# EAGLE board xv11_lidar_controller (EAGLE 6.5.0)
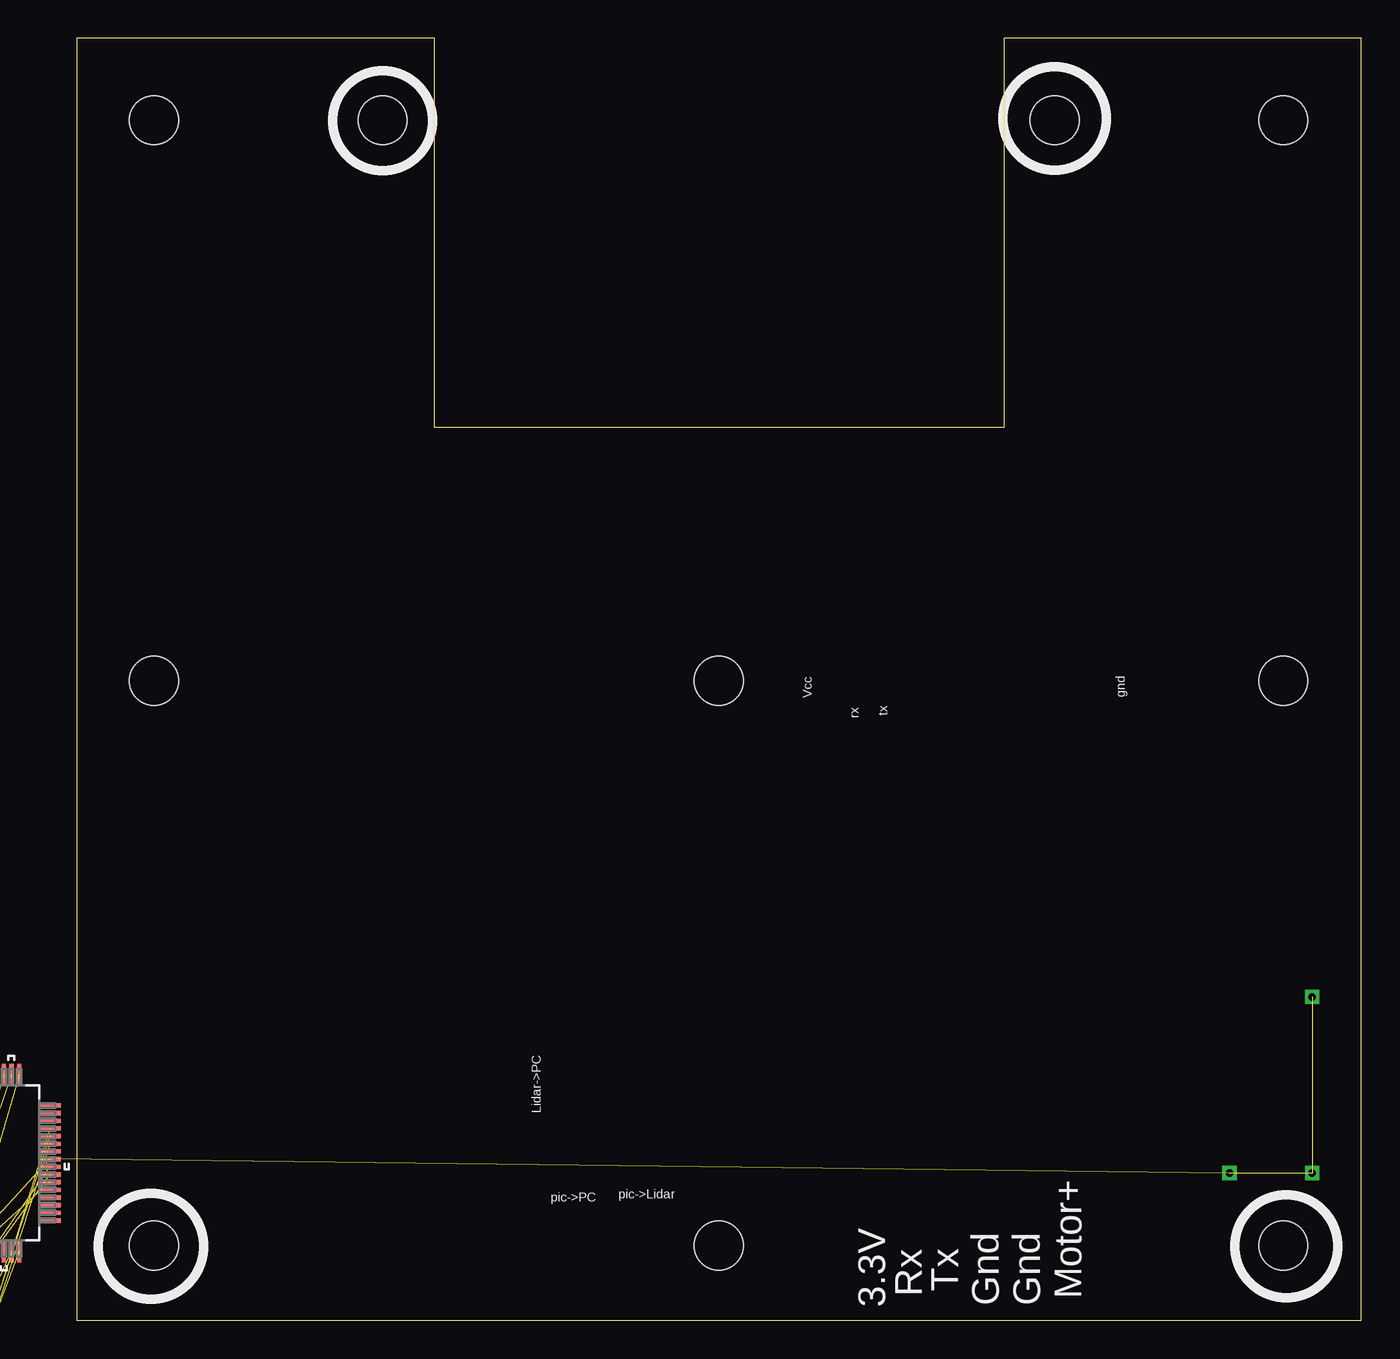
[diagram p0: board, top side]
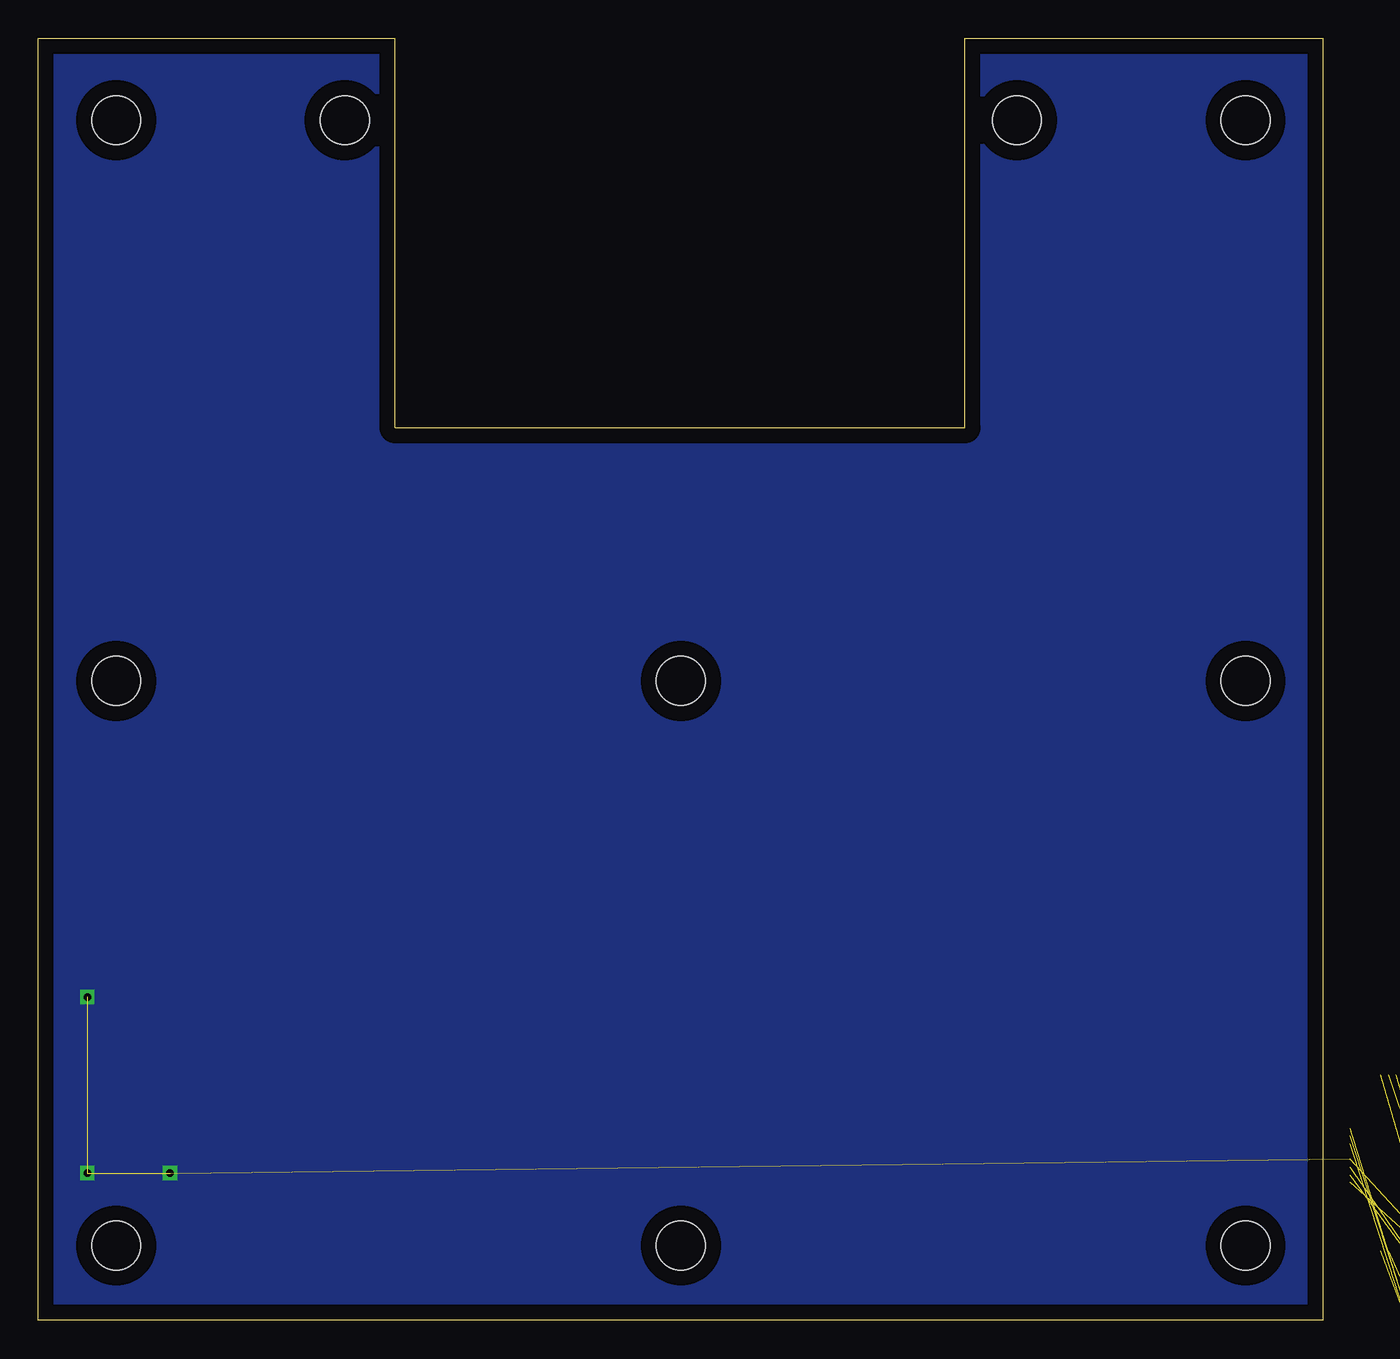
[diagram p1: board, bottom side, seen from below]

Size 83.76 x 83.63 mm. Coordinates in mm from the lower left corner, seen from the top.
Outline: 0,0 83.76,0 83.76,83.63 60.5,83.63 60.5,58.23 23.31,58.23 23.31,83.63 0,83.63 0,0
Copper layers (1+16): Top 0.035mm / dielectric 1.5mm / Bottom 0.035mm
Design rules "default *": minimum track width 8mil, minimum drill 15mil, track to track 8mil, track to pad 8mil, pad to pad 8mil, via to via 8mil, smd to smd 8mil, copper to edge 40mil, drill to drill 8mil, minimum pad ring 10mil, minimum via ring 8mil, stop-mask expansion 4mil, vias tented up to drill 0mil, thermal gap 10mil
Holes 3.17 mm at 5.02,4.89 78.68,4.89 5.02,41.72 19.94,78.3 63.77,78.3 41.85,4.89 78.68,41.72 5.02,78.3 78.68,78.3 41.85,41.72

## Footprints (pad centres in the part's own frame; a part is rotated, then mirrored left to right if it is on the bottom)
HRP5 = smd 1.07 x 1.37: 1 -3.44,0; 2 -1.72,0; 3 0,0; 4 1.72,0; 5 3.44,0 | smd 10 x 9: G 0,6.254
1X05_LOCK = drill 1.016 pad 1.88: 1 0,0.127; 2 2.54,-0.127; 3 5.08,0.127; 4 7.62,-0.127; 5 10.16,0.127
EIA3216 = smd 1.4 x 1.6: A 1.4,0; C -1.4,0
0805 = smd 0.8 x 1.2: 1 -0.9,0; 2 0.9,0
C0805K = smd 1.1 x 1.4: 1 -1,0; 2 1,0
1X02_LOCK = drill 1.016 pad 1.88: 1 -0.178,0; 2 2.718,0
SMA-DIODE = smd 1.27 x 1.47: A -2.15,0; C 2.15,0
ECX-32 = smd 1.3 x 1.1: 1 -1.15,-0.9; 2 1.15,-0.9; 3 1.15,0.9; 4 -1.15,0.9
R1206 = smd 1.6 x 1.803: 1 -1.422,0; 2 1.422,0
M2 = drill 1.4 long: 1 -2.54,0; 2 2.54,0
CHIP-LED0805 = smd 1.2 x 1.2: A 0,-1.05; C 0,1.05
1X04_LOCK = drill 1.016 pad 1.88 square: 1 0,0.127 | drill 1.016 pad 1.88: 2 2.54,-0.127; 3 5.08,0.127; 4 7.62,-0.127
SO-08 = smd 0.6 x 2.2: 1 -1.905,-2.6; 2 -0.635,-2.6; 3 0.635,-2.6; 4 1.905,-2.6; 5 1.905,2.6; 6 0.635,2.6; 7 -0.635,2.6; 8 -1.905,2.6
QFP50P1200X1200X120-64N = smd 1.473 x 0.279: 1 -5.74,3.759; 2 -5.74,3.251; 3 -5.74,2.743; 4 -5.74,2.261; 5 -5.74,1.753; 6 -5.74,1.245; 7 -5.74,0.762; 8 -5.74,0.254; 9 -5.74,-0.254; 10 -5.74,-0.762; 11 -5.74,-1.245; 12 -5.74,-1.753; 13 -5.74,-2.261; 14 -5.74,-2.743; 15 -5.74,-3.251; 16 -5.74,-3.759; 33 5.74,-3.759; 34 5.74,-3.251; 35 5.74,-2.743; 36 5.74,-2.261; 37 5.74,-1.753; 38 5.74,-1.245; 39 5.74,-0.762; 40 5.74,-0.254; 41 5.74,0.254; 42 5.74,0.762; 43 5.74,1.245; 44 5.74,1.753; 45 5.74,2.261; 46 5.74,2.743; 47 5.74,3.251; 48 5.74,3.759 | smd 0.279 x 1.473: 17 -3.759,-5.74; 18 -3.251,-5.74; 19 -2.743,-5.74; 20 -2.261,-5.74; 21 -1.753,-5.74; 22 -1.245,-5.74; 23 -0.762,-5.74; 24 -0.254,-5.74; 25 0.254,-5.74; 26 0.762,-5.74; 27 1.245,-5.74; 28 1.753,-5.74; 29 2.261,-5.74; 30 2.743,-5.74; 31 3.251,-5.74; 32 3.759,-5.74; 49 3.759,5.74; 50 3.251,5.74; 51 2.743,5.74; 52 2.261,5.74; 53 1.753,5.74; 54 1.245,5.74; 55 0.762,5.74; 56 0.254,5.74; 57 -0.254,5.74; 58 -0.762,5.74; 59 -1.245,5.74; 60 -1.753,5.74; 61 -2.261,5.74; 62 -2.743,5.74; 63 -3.251,5.74; 64 -3.759,5.74
1X05_LOCK_LONGPADS = drill 1.016 long: 1 0,0; 2 2.54,-0.254; 3 5.08,0; 4 7.62,-0.254; 5 10.16,0
R0805 = smd 1.1 x 1.4: 1 -1,0; 2 1,0
M0805 = smd 1.3 x 1.6: 1 -0.95,0; 2 0.95,0
B3F-10XX = drill 1.016 long: 1 -3.251,2.261; 2 3.251,2.261; 3 -3.251,-2.261; 4 3.251,-2.261
2X3-NS = drill 1.016 pad 1.88 square: 1 -2.54,-1.27 | drill 1.016 pad 1.88 octagon: 2 -2.54,1.27; 3 0,-1.27; 4 0,1.27; 5 2.54,-1.27; 6 2.54,1.27
SO08 = smd 0.66 x 2.032: 1 -1.905,-3.073; 2 -0.635,-3.073; 3 0.635,-3.073; 4 1.905,-3.073; 5 1.905,3.073; 6 0.635,3.073; 7 -0.635,3.073; 8 -1.905,3.073
1X03_LOCK = drill 1.016 pad 1.88: 1 0,0.127; 2 2.54,-0.127; 3 5.08,0.127

## Placement (x,y rotation side)
3.3V_REG  BA33DD0WHFP-TR  [HRP5]  -38,-99.45 0 top  (outside the outline)
ANALOG  M05LOCK  [1X05_LOCK]  -86.47,-235.29 0 top  (outside the outline)
C1  10uF Tantalum 16V  [EIA3216]  -40.09,-127.09 0 top  (outside the outline)
C2  0.1uF Ceramic 50v  [0805]  -89.87,-257.54 0 top  (outside the outline)
C3  1000pF Ceramic 50V  [0805]  -92.92,-283.04 0 top  (outside the outline)
C4  0.1uF Tantalum 16V  [C0805K]  -92.41,-292.75 0 top  (outside the outline)
C12  0.1uF Ceramic  [0805]  -17.23,1.94 0 top  (outside the outline)
C13  0.1uF Ceramic  [0805]  -20.27,1.94 0 top  (outside the outline)
C14  0.1uF Ceramic  [0805]  -23.32,1.94 0 top  (outside the outline)
C15  0.1uF Ceramic  [0805]  -26.37,1.94 0 top  (outside the outline)
C16  0.1uF Ceramic  [0805]  -29.42,1.94 0 top  (outside the outline)
C17  0.1uF Ceramic  [0805]  -32.47,-27.67 0 top  (outside the outline)
C18  0.1uF Ceramic  [0805]  -35.51,-27.67 0 top  (outside the outline)
C19  .1uF ceramic 50v  [0805]  -35.51,-58.56 0 top  (outside the outline)
C20  10uF Ceramic  [0805]  -38.56,-58.56 0 top  (outside the outline)
C21  0.1uF Ceramic  [0805]  -41.61,-58.56 0 top  (outside the outline)
C22  10uF Tantalum 16V  [EIA3216]  -31.3,-127.09 0 top  (outside the outline)
C23  10uF Tantalum 16V  [EIA3216]  -22.51,-127.09 0 top  (outside the outline)
C24  100uF Tantalum 16V  [EIA3216]  -33.38,-123.33 0 top  (outside the outline)
C27  0.1uF Tantalum 16V  [C0805K]  -41.1,-114.29 0 top  (outside the outline)
C28  0.1uF Tantalum 16V  [C0805K]  -26.52,-114.29 0 top  (outside the outline)
CAN  M02LOCK  [1X02_LOCK]  -89.51,-268.52 0 top  (outside the outline)
D1  ES2AA-13-F  [SMA-DIODE]  -20.48,-118.91 0 top  (outside the outline)
D2  ES2AA-13-F  [SMA-DIODE]  -103.59,-318.91 0 top  (outside the outline)
D3  ES2AA-13-F  [SMA-DIODE]  -125.13,-391.71 0 top  (outside the outline)
ECS-240-20-33-TR1  ECS-240-20-33-TR_24mHz_Digikey  [ECX-32]  -27.23,-25.95 0 top  (outside the outline)
F1  1AmpFuse_C1S 2  [R1206]  -125.48,-337.76 0 top  (outside the outline)
F2  1AmpFuse_C1S 2  [R1206]  -125.48,-386.58 0 top  (outside the outline)
F3  2AmpFuse_C1S 2  [R1206]  -40.59,-103.31 0 top  (outside the outline)
J1  EUROMAG-290DEG  [M2]  -48.21,-123.99 0 top  (outside the outline)
LED0  Blue  [CHIP-LED0805]  -61.22,-180.07 0 top  (outside the outline)
LED1  Blue  [CHIP-LED0805]  -67.26,-180.07 0 top  (outside the outline)
LED3  Blue  [CHIP-LED0805]  -73.31,-180.07 0 top  (outside the outline)
LED4  Blue  [CHIP-LED0805]  -79.35,-180.07 0 top  (outside the outline)
LED5  Blue  [CHIP-LED0805]  -85.4,-180.07 0 top  (outside the outline)
LIDAR_MOTOR_OUTPUT  M02LOCK  [1X02_LOCK]  -104.6,-313.02 0 top  (outside the outline)
LIDAR_UART4  [1X04_LOCK]  -126.14,-396.79 0 top  (outside the outline)
MOTOR1  Yellow  [CHIP-LED0805]  -125.02,-353.45 0 top  (outside the outline)
MOTOR_DRIVER  MIC4427YM  [SO-08]  -87.03,-281.17 0 top  (outside the outline)
MOTORA  Yellow  [CHIP-LED0805]  -27.95,-4.41 0 top  (outside the outline)
MOTORB_OUTPUT  M02LOCK  [1X02_LOCK]  -126.14,-380.02 0 top  (outside the outline)
PIC5V  Green  [CHIP-LED0805]  -23.88,-93.26 0 top  (outside the outline)
PIC5V1  Green  [CHIP-LED0805]  -91.45,-300.88 0 top  (outside the outline)
PIC32  PIC32MX575F512H-80I/PT  [QFP50P1200X1200X120-64N]  -7.52,10.27 0 top
PIC_PROG1  Prog  [1X05_LOCK_LONGPADS]  -35.26,-47.84 0 top  (outside the outline)
R1  10 5%  [R0805]  -52.74,-131.1 0 top  (outside the outline)
R2  330 5%  [R0805]  -52.74,-141.57 0 top  (outside the outline)
R3  1k 5%  [M0805]  -89.36,-262.17 0 top  (outside the outline)
R4  100 5%  [M0805]  -92.41,-287.72 0 top  (outside the outline)
R5  330  [R0805]  -92.41,-306.67 0 top  (outside the outline)
R6  100 5%  [M0805]  -125.99,-343.4 0 top  (outside the outline)
R7  100 5%  [R0805]  -35.01,-54.39 0 top  (outside the outline)
R8  330 5%  [M0805]  -28.91,-10.2 0 top  (outside the outline)
R9  10k 5%  [R0805]  -27.18,-54.39 0 top  (outside the outline)
R10  330 5%  [R0805]  -41.1,-63.18 0 top  (outside the outline)
R11  330 5%  [R0805]  -52.74,-147.1 0 top  (outside the outline)
R12  330 5%  [R0805]  -52.74,-152.64 0 top  (outside the outline)
R13  330 5%  [R0805]  -52.74,-158.18 0 top  (outside the outline)
R18  2.2k 5%  [M0805]  -86.31,-190.79 0 top  (outside the outline)
R19  2.2k 5%  [M0805]  -86.31,-196.33 0 top  (outside the outline)
R20  100 5%  [R0805]  -86.31,-206.79 0 top  (outside the outline)
R21  2.2k 5%  [M0805]  -41.1,-82.84 0 top  (outside the outline)
R22  2.2k 5%  [M0805]  -34.6,-82.84 0 top  (outside the outline)
R23  100 5%  [R0805]  -86.31,-212.33 0 top  (outside the outline)
R24  100 5%  [R0805]  -86.31,-217.87 0 top  (outside the outline)
R25  100 5%  [R0805]  -86.31,-223.41 0 top  (outside the outline)
R26  100 5%  [R0805]  -86.31,-228.94 0 top  (outside the outline)
R27  330 5%  [M0805]  -125.99,-359.24 0 top  (outside the outline)
R39  330  [R0805]  -19.36,-108.95 0 top  (outside the outline)
S1  [B3F-10XX]  -31.7,-41.03 0 top  (outside the outline)
SPI2_TOUCHSCREEN  [2X3-NS]  -131.93,-393.18 0 top  (outside the outline)
U$12  ATA6560  [SO08]  -83.72,-249.77 0 top  (outside the outline)
UART1  M03LOCK  [1X03_LOCK]  -126.14,-372.81 0 top  (outside the outline)
UARTRX  Green  [CHIP-LED0805]  -40.14,-77.05 0 top  (outside the outline)
UARTRX1  Green  [CHIP-LED0805]  -97.49,-306.41 0 top  (outside the outline)
UARTTX  Red  [CHIP-LED0805]  -34.09,-76.9 0 top  (outside the outline)
UARTTX4  Red  [CHIP-LED0805]  -103.54,-306.41 0 top  (outside the outline)

## Library data of the parts
3.3V_REG J1 U$12 = NASA_LIB
ANALOG CAN LIDAR_MOTOR_OUTPUT LIDAR_UART4 MOTORB_OUTPUT PIC_PROG1 SPI2_TOUCHSCREEN UART1 = SparkFun-Connectors
C1-C3 C12-C18 C20-C24 = SparkFun-Capacitors
C4 C27 C28 F1-F3 LED0 LED1 LED3-LED5 MOTOR1 MOTORA PIC5V PIC5V1 R1-R13 R18-R27 R39 UARTRX UARTRX1 UARTTX UARTTX4 = adafruit
C19 = SparkFun-Capacitors; PROD_ID: CAP-08064
D1-D3 = SparkFun-DiscreteSemi
ECS-240-20-33-TR1 = Crystal ECS
MOTOR_DRIVER = transistor-power
PIC32 = Microchip_By_element14_Batch_1; DESCRIPTION: IC MCU; MPN: PIC32MX675F512H-80I/PT; OC_FARNELL: 1778969; OC_NEWARK: 25R8399; PACKAGE: TQFP-64; SUPPLIER: Microchip
S1 = switch-omron

## Nets
5V: C2.2 U$12.2
5VINPUT: F3.2 J1.2
!MCLR: C19.1 PIC32.7 PIC_PROG1.1 R7.2 R9.1
+3V3: 3.3V_REG.4 C1.A C12.2 C13.2 C14.2 C15.2 C22.A C28.1 LED0.A LED1.A LED3.A LED4.A LED5.A PIC32.10 PIC32.26 PIC32.38 PIC32.57 PIC_PROG1.2 R1.2 R5.1 R8.2 R9.2 R21.2 R22.2 R27.2
GND: 3.3V_REG.3 3.3V_REG.G C1.C C2.1 C3.1 C4.2 C12.1 C13.1 C14.1 C15.1 C16.1 C17.2 C18.1 C19.2 C20.1 C21.1 C22.C C23.C C24.C C27.2 C28.2 D1.A D2.A D3.A ECS-240-20-33-TR1.2 ECS-240-20-33-TR1.4 J1.1 LIDAR_MOTOR_OUTPUT.2 LIDAR_UART4.4 MOTOR_DRIVER.3 MOTORB_OUTPUT.2 PIC5V1.C PIC5V.C PIC32.9 PIC32.20 PIC32.25 PIC32.41 PIC_PROG1.3 S1.1 SPI2_TOUCHSCREEN.6 U$12.3 UART1.3
LIDAR_MOTOR_DRIVE: MOTOR_DRIVER.4 MOTORA.C
LIDAR_MOTOR_OUTPUT: D2.C F1.1 LIDAR_MOTOR_OUTPUT.1
LIDAR_MOTOR_OUTPUT1: D3.C F2.1 MOTORB_OUTPUT.1
LIDAR_MOTORA_DRIVE: R4.2
MOTORB_DRIVE: MOTOR1.C MOTOR_DRIVER.2 R6.2
N$1: R18.2 R19.2
N$2: PIC32.58 U$12.4
N$3: PIC32.59 U$12.1
N$4: C3.2 F1.2 MOTOR_DRIVER.5
N$5: PIC32.51 R4.1
N$6: PIC32.50 R6.1
N$7: PIC5V1.A R5.2
N$8: R18.1 UARTRX1.A
N$9: MOTOR1.A R27.1
N$10: PIC32.61 R2.2
N$11: C17.1 ECS-240-20-33-TR1.1 PIC32.39
N$12: C18.2 ECS-240-20-33-TR1.3 PIC32.40
N$13: PIC32.62 R11.2
N$14: PIC32.63 R12.2
N$15: PIC32.64 R13.2
N$16: C16.2 PIC32.19 R1.1
N$17: C20.2 C21.2 PIC32.56
N$18: PIC32.60 R10.2
N$19: PIC32.16 PIC_PROG1.4
N$20: LED0.C R10.1
N$21: PIC32.8 SPI2_TOUCHSCREEN.4
N$22: LED1.C R2.1
N$23: R7.1 S1.3
N$24: LED3.C R11.1
N$25: LED4.C R12.1
N$26: LED5.C R13.1
N$27: R21.1 UARTRX.A
N$28: R22.1 UARTTX.A
N$29: LIDAR_UART4.3 PIC32.49 UARTRX1.C
N$30: LIDAR_UART4.2 PIC32.43 UARTTX4.C
N$31: MOTORA.A R8.1
N$32: PIC32.17 R20.1
N$33: PIC32.18 R23.1
N$34: PIC32.21 R24.1
N$35: PIC32.22 R25.1
N$36: PIC32.23 R26.1
N$38: ANALOG.5 R20.2
N$39: ANALOG.4 R23.2
N$40: ANALOG.3 R24.2
N$41: ANALOG.2 R25.2
N$42: ANALOG.1 R26.2
N$43: R19.1 UARTTX4.A
N$44: CAN.1 U$12.7
N$45: CAN.2 U$12.6
N$46: PIC32.44 U$12.8
N$47: PIC32.45 R3.1 U$12.5
N$49: F2.2 MOTOR_DRIVER.7
N$50: PIC5V.A R39.2
PIC_HANG_CHK: PIC32.15 PIC_PROG1.5
PICUART_RX: PIC32.31 UART1.1 UARTRX.C
PICUART_TX: PIC32.32 UART1.2 UARTTX.C
SCK2: PIC32.4 SPI2_TOUCHSCREEN.1
SDI2: PIC32.5 SPI2_TOUCHSCREEN.3
SDO2: PIC32.6 SPI2_TOUCHSCREEN.5
VCC: 3.3V_REG.1 3.3V_REG.2 C4.1 C23.A C24.A C27.1 D1.C F3.1 LIDAR_UART4.1 MOTOR_DRIVER.6 R3.2 R39.1 SPI2_TOUCHSCREEN.2
VUSB: PIC32.35

## Tracks (layer width: path | path; a pad name or v marks a point on that pad's centre or on a via)
5V  (1 unrouted)
5VINPUT  (1 unrouted)
!MCLR  (4 unrouted)
+3V3  (24 unrouted)
  pour Top (isolate 0.254): -0.06,83.32 83.81,83.58 83.71,0.47 -0.16,0.22
GND  (via drill 0.51)  (44 unrouted)
  other vias: 80.56,21.09 75.18,9.61 80.56,9.61
  pour Bottom (isolate 0.254): -0.11,83.63 83.87,83.53 83.71,0.47 -0.26,0.57
LIDAR_MOTOR_DRIVE  (1 unrouted)
LIDAR_MOTOR_OUTPUT  (2 unrouted)
LIDAR_MOTOR_OUTPUT1  (2 unrouted)
MOTORB_DRIVE  (2 unrouted)
N$1  (1 unrouted)
N$2  (1 unrouted)
N$3  (1 unrouted)
N$4  (2 unrouted)
N$5  (1 unrouted)
N$6  (1 unrouted)
N$7  (1 unrouted)
N$8  (1 unrouted)
N$9  (1 unrouted)
N$10  (1 unrouted)
N$11  (2 unrouted)
N$12  (2 unrouted)
N$13  (1 unrouted)
N$14  (1 unrouted)
N$15  (1 unrouted)
N$16  (2 unrouted)
N$17  (2 unrouted)
N$18  (1 unrouted)
N$19  (1 unrouted)
N$20  (1 unrouted)
N$21  (1 unrouted)
N$22  (1 unrouted)
N$23  (1 unrouted)
N$24  (1 unrouted)
N$25  (1 unrouted)
N$26  (1 unrouted)
N$27  (1 unrouted)
N$28  (1 unrouted)
N$29  (2 unrouted)
N$30  (2 unrouted)
N$31  (1 unrouted)
N$32  (1 unrouted)
N$33  (1 unrouted)
N$34  (1 unrouted)
N$35  (1 unrouted)
N$36  (1 unrouted)
N$38  (1 unrouted)
N$39  (1 unrouted)
N$40  (1 unrouted)
N$41  (1 unrouted)
N$42  (1 unrouted)
N$43  (1 unrouted)
N$44  (1 unrouted)
N$45  (1 unrouted)
N$46  (1 unrouted)
N$47  (2 unrouted)
N$49  (1 unrouted)
N$50  (1 unrouted)
PIC_HANG_CHK  (1 unrouted)
PICUART_RX  (2 unrouted)
PICUART_TX  (2 unrouted)
SCK2  (1 unrouted)
SDI2  (1 unrouted)
SDO2  (1 unrouted)
VCC  (12 unrouted)

## Text on the board
tPlace: Vcc | gnd | tx | rx
tNames: Lidar->PC | pic->PC | pic->Lidar | Rx | Tx | Motor+ | 3.3V | Gnd | Gnd